# Altium PCB PCB1.PcbDoc
Units mil, origin at the board's own origin, x right, y up, seen from the top; angles counter-clockwise.
Board outline 2290.02 x 2340.03 mil, 2 copper layers (Top Layer, Bottom Layer); 17 components, 18 nets, 99 pads, 3 vias.
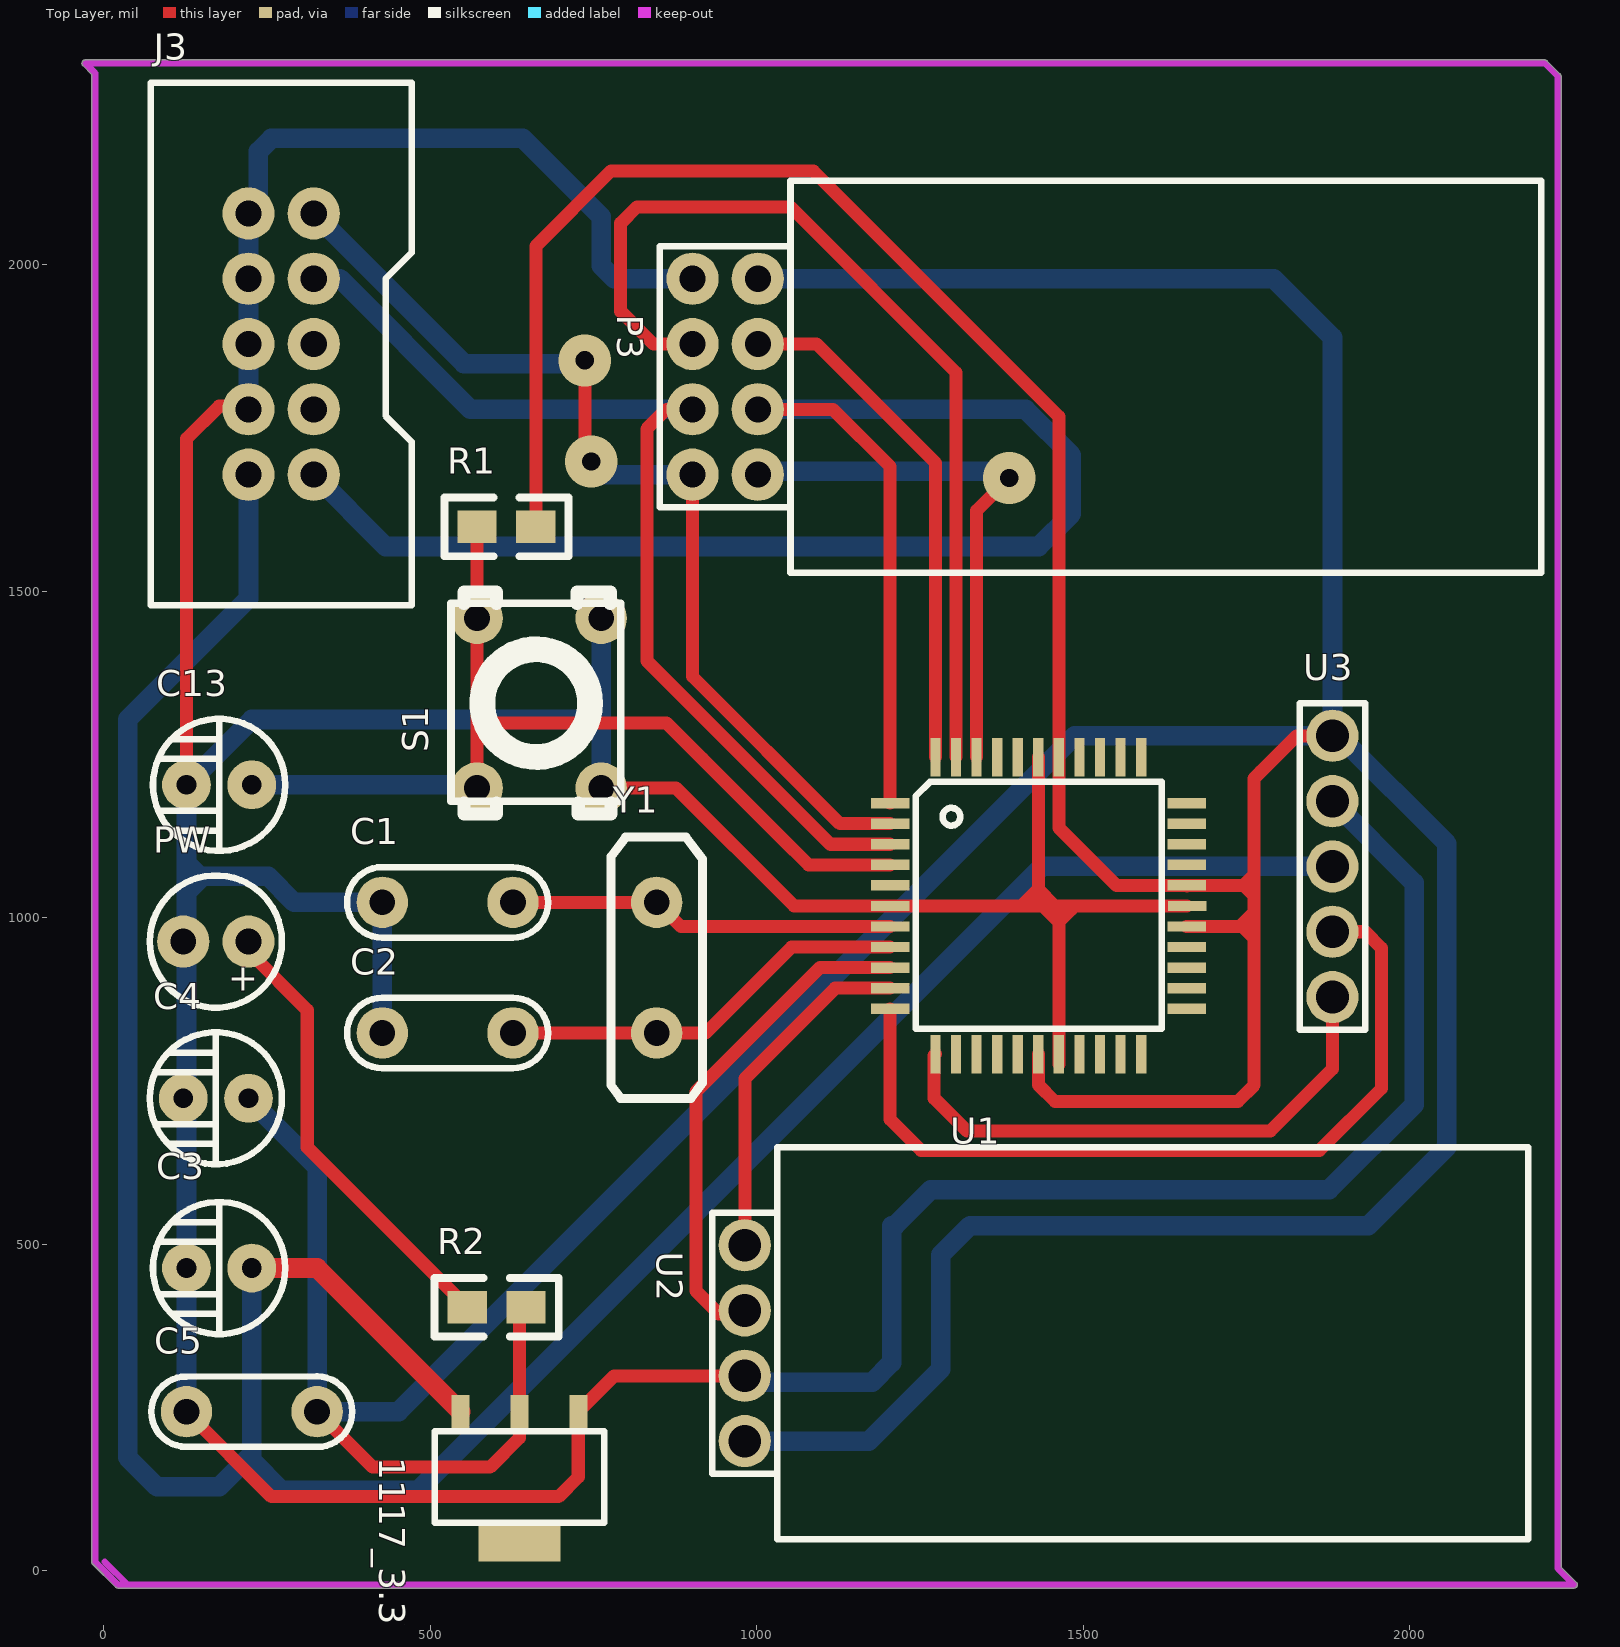
[diagram p0: Top Layer view]
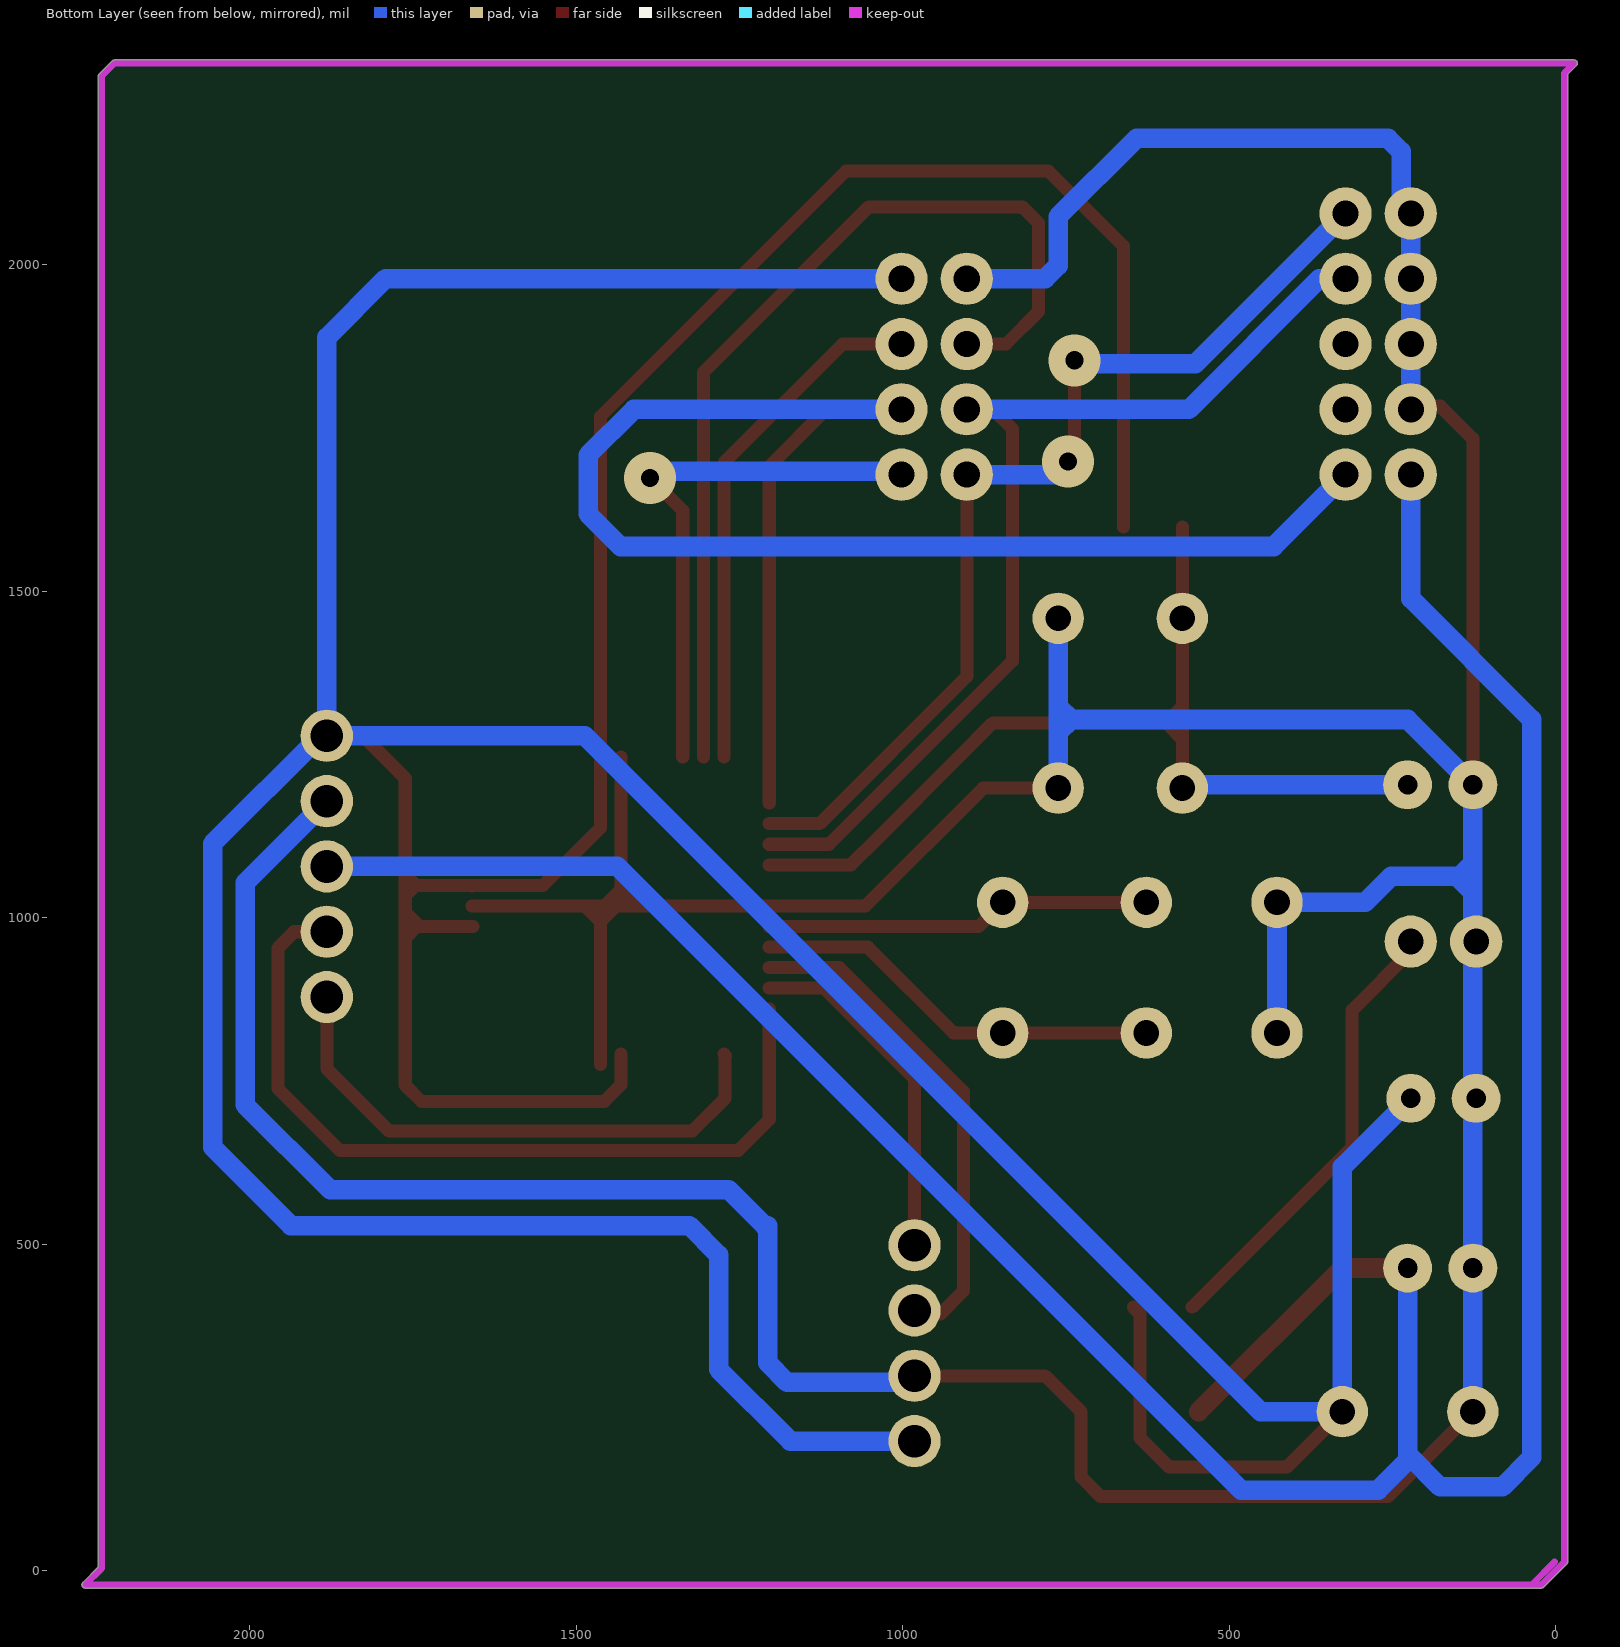
[diagram p1: Bottom Layer view, seen from below]

## Layer stack, top to bottom
Top Layer: signal copper 1.4
Dielectric: dielectric 12.6, FR-4, Dk 4.8
Bottom Layer: signal copper 1.4

## Board outline
-17,9.91 cw(c-13.47,13.47) -18.49,13.47 -18.49,2291.4 -32.02,2304.93 -32,2304.91 cw(c-28.47,2308.47) -28.47,2313.49 2206.53,2313.49 cw(c2206.53,2308.47) 2210.09,2312 2210.07,2312.02 2230.07,2292.02 2230.05,2292.04 cw(c2226.53,2288.47) 2231.54,2288.47 2231.54,5.55 2255.07,-17.98 2255.05,-17.96 cw(c2251.53,-21.53) 2256.54,-21.53 cw(c2251.53,-21.53) 2251.53,-26.54 21.53,-26.54 cw(c21.53,-21.53) 17.96,-25.05 17.98,-25.07

## Design rules (kind name [scope] priority, off if disabled: settings)
Clearance [All] p1: gap=10
PolygonConnect [All] p1: connectstyle=Relief reliefconductorwidth=10 reliefentries=4 polygonreliefangle="90 Angle"
RoutingVias [All] p1: holewidth=28 width=50 viastyle="Through Hole" minholewidth=28 minwidth=50 maxholewidth=28 maxwidth=50
SilkscreenOverComponentPads [All] p1: minsilkscreentomaskgap=10
SolderMaskExpansion [All] p1: expansion=4
Width [All] p1: maxlimit=80 minlimit=10 preferedwidth=20
27 further rules are at their usual default settings.

## Components (designator, comment, footprint, x,y, rotation, side; value= is the part's Value field where it differs from the comment)
1117_3.3V "AMS1117" "AMS1117-3.3V  SOT-223  贴片" 726.53,243.47 r180 top
C1 "" 电容CBB224(0.22) 426.53,1023.47 r0 top
C2 "" 电容CBB224(0.22) 426.53,823.47 r0 top
C3 "" 电容 226.53,463.47 r180 top
C4 "" 电容 221.53,723.47 r180 top
C5 "Cap" 电容CBB224(0.22) 326.53,243.47 r180 top
C13 "" 电容 226.53,1203.47 r180 top
J3 "牛角座" 下载口（12345） 321.53,1678.47 r90 top
P3 "无线" 无线模块 1001.53,1978.47 r270 top
PW "" LED 221.53,963.47 r180 top
R1 "" 0805 661.53,1598.47 r180 top
R2 "" 0805 646.53,403.47 r180 top
S1 "" 4脚按键 561.53,1198.47 r0 top
U1 "atmaega164" 44贴片（顶层） 1341.53,1058.47 r0 top
U2 "蓝牙" 蓝牙 981.53,498.47 r270 top
U3 "usb外接" usb 1881.53,878.47 r90 top
Y1 "8M" 晶振 846.53,823.47 r90 top

## Footprints (in the part's own frame and the unit in brackets; to place one, negate y for a bottom-side part, rotate by r counter-clockwise, add the part's x,y. Pads: shape width x height; smd on the part's side, far side on the other; paste and mask are expansions set on the pad)
4脚按键 [mm]
  round 2 hole 1: 1(0.254,0) 1(0.254,6.604) 2(5.08,0) 2(5.08,6.604)
  silkscreen extent -0.76,-1.02 5.84,7.62
44贴片（顶层） [mm]
  rect 1.5x0.4 smd: 1(-3.492,2.971) 2(-3.492,2.171) 3(-3.492,1.371) 4(-3.492,0.571) 5(-3.492,-0.229) 6(-3.492,-1.029) 7(-3.492,-1.829) 8(-3.492,-2.629) 9(-3.492,-3.429) 10(-3.492,-4.229) 11(-3.492,-5.029) 23(8.039,-5.029) 24(8.039,-4.229) 25(8.039,-3.429) 26(8.039,-2.629) 27(8.039,-1.829) 28(8.064,-1.029) 29(8.039,-0.229) 30(8.039,0.571) 31(8.039,1.371) 32(8.039,2.171) 33(8.039,2.971)
  rect 0.4x1.5 smd: 12(-1.727,-6.794) 13(-0.927,-6.794) 14(-0.127,-6.794) 15(0.673,-6.794) 16(1.473,-6.794) 17(2.273,-6.794) 18(3.073,-6.794) 19(3.873,-6.794) 20(4.673,-6.794) 21(5.473,-6.794) 22(6.273,-6.794) 34(6.273,4.763) 35(5.473,4.763) 36(4.673,4.763) 37(3.873,4.763) 38(3.073,4.763) 39(2.273,4.763) 40(1.473,4.763) 41(0.673,4.763) 42(-0.127,4.763) 43(-0.927,4.763) 44(-1.727,4.763)
  silkscreen extent -2.5,-5.8 7.07,3.8
0805 [mil]
  rect 60x50 smd: 1(0,0) 2(90,0)
  silkscreen extent -50,-45 140,45
"AMS1117-3.3V  SOT-223  贴片" [mm]
  rect 0.7x1.3 smd: 1(0,0) 2(2.286,0) 3(4.572,0)
  rect 3.2x1.5 smd: ""(2.286,5.08)
  silkscreen extent -1.02,0.76 5.59,4.32
LED [mil]
  round 80 hole 39.37: 1(0,0) 2(100,0)
  silkscreen extent -51,-101 151,101
usb [mil]
  round 80 hole 50: 1(0,0) 2(100,0) 3(200,0) 4(300,0) 5(400,0)
  silkscreen extent -50,-50 450,50
下载口（12345） [mil]
  round 80 hole 40: 1(0,0) 2(100,0) 3(200,0) 4(300,0) 5(400,0) 6(0,100) 7(100,100) 8(200,100) 9(300,100) 10(400,100)
  silkscreen extent -200,-150 600,250
无线模块 [mil]
  round 80 hole 40: 1(0,-100) 2(0,0) 3(100,-100) 4(100,0) 5(200,-100) 6(200,0) 7(300,-100) 8(300,0)
  silkscreen extent -150,-150 450,1200
晶振 [mm]
  round 2 hole 1: 1(0,0) 2(5.08,0)
  silkscreen extent -2.54,-1.78 7.62,1.78
电容 [mm]
  round 1.9 hole 0.762: 1(0,0) 2(2.54,0)
  silkscreen extent -1.3,-2.57 3.84,2.57
电容CBB224(0.22) [mm]
  round 2 hole 1: 1(0,0) 2(5.08,0)
  silkscreen extent -1.37,-1.37 6.45,1.37
蓝牙 [mil]
  round 80 hole 50: 1(0,0) 2(100,0) 3(200,0) 4(300,0)
  silkscreen extent -150,-50 450,1200

## Part data
1117_3.3V: library part Component_1
C1 C2: library part Cap, "Capacitor"
C3 C4 C13: library part "Cap Pol3", "Polarized Capacitor (Surface Mount)"
C5: "Capacitor"
J3: library part "Header 5X2A", "Header, 5-Pin, Dual row"
P3: library part "Header 4X2", "Header, 4-Pin, Dual row"
PW: library part LED0, "Typical INFRARED GaAs LED"
R1 R2: library part Res2, "Resistor"
S1: library part SW-PB, "Switch"
Y1: library part XTAL, "Crystal Oscillator"

## Via types
v1: diameter 80, hole 28, Top Layer to Bottom Layer, 3 vias

## Nets (pads, with @x,y where several pads share a name; then routed paths per layer and width w, separated by ;. In a path a pad name is that pad's centre, name@x,y a point inside that pad or via, vN(x,y) a via of type N, cw(c..) or ccw(c..) an arc to the next point about the centre after c; other vN are vias at no path point)
3.3V: 1117_3.3V.2 C4.1 C5.1 P3.2 R1.1 R2.1 U1.17 U1.27 U1.29 U1.38 U2.4 U3.5 | length 10315.6
  Top Layer w20: C5.1 411.53,158.47 591.53,158.47 636.53,203.47 1117_3.3V.2 636.53,393.47 R2.1 ; R1.1 661.53,2028.47 776.53,2143.47 1086.53,2143.47 1462.52,1767.48 1462.52,1308.47 U1.38 1462.52,1137.48 1550.53,1049.47 U1.29 ; U1.17 1431.03,743.97 1456.53,718.47 1736.53,718.47 1761.53,743.47 1761.53,1033.47 ; U1.27 1709.53,986.48 1739.53,986.48 ; U1.29@1659.02,1048.47 U1.29 ; 1761.53,968.47 1743.52,986.48 1739.53,986.48 ; 1761.53,1068.47 1761.53,1065.47 1745.53,1049.47 ; U3.5 1826.53,1278.47 1771.53,1223.47 1761.53,1213.47 1761.53,1033.47 ; U1.29 1745.53,1049.47 ; 1739.53,986.48 1761.53,1008.47 1761.53,1033.47 ; 1745.53,1049.47 1761.53,1033.47
  Bottom Layer w30: C4.1@221.53,728.47 C4.1 326.53,618.47 ; 326.53,598.47 326.53,618.47 ; U2.4 1171.53,198.47 1281.53,308.47 1281.53,483.47 1326.53,528.47 1936.53,528.47 2056.53,648.47 2056.53,1113.47 1891.53,1278.47 U3.5 ; P3.2 1791.53,1978.47 1881.53,1888.47 U3.5 ; 326.53,618.47 C5.1 451.53,243.47 1486.53,1278.47 U3.5
CE: P3.3 U1.43 | length 1483.6
  Top Layer w20: P3.3 841.53,1878.47 791.53,1928.47 791.53,2063.47 816.53,2088.47 1051.53,2088.47 1305.04,1834.96 1305.04,1734.96 U1.43
CSN: P3.4 U1.44 | length 797.9
  Top Layer w20: P3.4 1091.53,1878.47 1273.55,1696.45 U1.44
GND: 1117_3.3V.1 C1.1 C2.1 C3.2 C4.2 C5.2 C13.2 J3.7 J3.8 J3.9 J3.10 P3.1 PW.2 S1.2 U1.6 U1.18 U1.28 U1.39 U2.3 U3.4 | length 8870
  Top Layer w20: C5.2 256.53,113.47 696.53,113.47 726.53,143.47 1117_3.3V.1 781.53,298.47 U2.3@966.38,298.47 ; C13.2 126.53,1733.47 176.53,1783.47 216.53,1783.47 J3.7 ; S1.2@761.53,1198.47 876.53,1198.47 1057.03,1017.97 U1.6 U1.28 ; 1406.53,1017.97 1406.53,1018.97 1431.03,1043.47 ; 1431.03,1017.97 1431.03,1043.47 ; U1.39 1431.03,1043.47 ; 1438.02,1017.97 1462.52,993.47 ; 1456.53,1017.97 1431.03,1043.47 ; U1.18@1462.52,775.47 1462.52,993.47 ; 1462.52,1008.97 1462.52,993.47 ; 1481.53,1017.97 1481.53,1012.48 1462.52,993.47 ; U3.4@1881.53,1163.33 U3.4
  Bottom Layer w30: C5.2 C13.2 226.53,1303.47 741.53,1303.47 ; 126.53,1038.47 151.53,1063.47 ; 126.53,1063.47 151.53,1063.47 ; 126.53,1083.47 146.53,1063.47 151.53,1063.47 ; J3.7 J3.10 236.53,2093.47 236.53,2173.47 256.53,2193.47 641.53,2193.47 761.53,2073.47 761.53,1998.47 781.53,1978.47 P3.1 ; C2.1 C1.1 291.53,1023.47 251.53,1063.47 151.53,1063.47 ; S1.2@761.53,1198.47 S1.2@761.53,1458.47 ; 761.53,1278.47 761.53,1283.47 741.53,1303.47 ; 761.53,1308.47 761.53,1303.47 741.53,1303.47 ; 761.53,1328.47 761.53,1323.47 741.53,1303.47 ; U2.3 991.53,288.47 1176.53,288.47 1206.53,318.47 1206.53,528.47 1211.53,528.47 1266.53,583.47 1876.53,583.47 2006.53,713.47 2006.53,1053.47 U3.4
IRQ: P3.8 U1.42 | length 859.4
  Top Layer w20: U1.42 1336.54,1623.49 v1(1386.53,1673.47)
  Bottom Layer w30: P3.8 1006.53,1683.47 1396.53,1683.47 v1(1386.53,1673.47)
MISO: J3.5 P3.7 U1.2 | length 1622.6
  Top Layer w20: v1(736.53,1853.47) 741.53,1853.47 736.53,1848.47 736.53,1678.47 746.53,1688.47 v1(746.53,1698.47) ; P3.7 901.53,1369.44 1127.01,1143.96 U1.2
  Bottom Layer w30: J3.5 551.53,1848.47 736.53,1848.47 741.53,1853.47 v1(736.53,1853.47) ; v1(746.53,1698.47) 746.53,1688.47 736.53,1678.47 P3.7
MOSI: J3.1 P3.6 U1.1 | length 2579.5
  Top Layer w20: P3.6 1116.53,1778.47 1204.03,1690.97 U1.1
  Bottom Layer w30: J3.1 431.53,1568.47 1431.53,1568.47 1481.53,1618.47 1481.53,1708.47 1411.53,1778.47 P3.6
NetC1_2: C1.2 U1.7 Y1.2 | length 592.8
  Top Layer w20: C1.2 Y1.2 883.52,986.48 U1.7
NetC2_2: C2.2 U1.8 Y1.1 | length 632
  Top Layer w20: C2.2 921.53,823.47 1053.03,954.98 U1.8
NetC13_1: C13.1 R1.2 S1.1 U1.4 | length 1547.4
  Top Layer w20: C13.1 C13.1@231.53,1198.47 ; S1.1@571.53,1198.47 571.53,1458.47 R1.2 ; 571.53,1273.47 596.53,1298.47 ; 571.53,1298.47 596.53,1298.47 ; 571.53,1323.47 596.53,1298.47 ; U1.4 1079.03,1080.97 1036.53,1123.47 916.53,1243.47 861.53,1298.47 596.53,1298.47
  Bottom Layer w30: C13.1 566.53,1203.47 S1.1@571.53,1198.47
NetPW_1: PW.1 R2.2 | length 698.8
  Top Layer w20: PW.1 221.53,948.47 311.53,858.47 311.53,648.47 R2.2
RES: J3.3
RXD0: U1.9 U2.2 | length 772.8
  Top Layer w20: U2.2 976.53,393.47 941.53,393.47 906.53,428.47 906.53,733.47 1096.54,923.49 U1.9
RXD1: U1.11 U3.2 | length 1281.4
  Top Layer w20: U1.11 1204.03,690.97 1251.53,643.47 1861.53,643.47 1956.53,738.47 1956.53,953.47 1931.53,978.47 U3.2
SCK: J3.4 P3.5 U1.3 | length 1589.2
  Top Layer w20: P3.5 861.53,1778.47 831.53,1748.47 831.53,1393.47 1112.54,1112.46 U1.3
  Bottom Layer w30: J3.4 361.53,1978.47 561.53,1778.47 P3.5
TXD0: U1.10 U2.1 | length 534.9
  Top Layer w20: U2.1 981.53,753.47 1120.04,891.99 U1.10
TXD1: U1.12 U3.1 | length 851.9
  Top Layer w20: U1.12@1271.05,788.47 U1.12 1271.53,788.95 1271.53,723.47 1321.53,673.47 1786.53,673.47 1881.53,768.47 U3.1
VCC: 1117_3.3V.3 C3.1 J3.6 U3.3 | length 4586.3
  Top Layer w30: C3.1 326.53,463.47 1117_3.3V.3
  Bottom Layer w30: J3.6 221.53,1488.47 36.53,1303.47 36.53,173.47 81.53,128.47 176.53,128.47 226.53,178.47 ; C3.1 226.53,178.47 ; U3.3 1436.53,1078.47 481.53,123.47 271.53,123.47 226.53,168.47 226.53,178.47
pads on no net: 1117_3.3V. J3.2 U1.5 U1.13 U1.14 U1.15 U1.16 U1.19 U1.20 U1.21 U1.22 U1.23 U1.24 U1.25 U1.26 U1.30 U1.31 U1.32 U1.33 U1.34 U1.35 U1.36 U1.37 U1.40 U1.41

## Keep-outs
Keep-Out Layer:
  lines w10: 1.53,13.47 36.53,-21.53 ; 36.53,-21.53 21.53,-21.53 -13.47,13.47 -13.47,2293.47 -28.47,2308.47 2206.53,2308.47 2226.53,2288.47 2226.53,3.47 2251.53,-21.53 36.53,-21.53

## Text inside footprints (layer, text, board x,y; h text height)
PW: Top Overlay "+" at 236.53,923.47 h40 r180